# EAGLE board LED-Lamp (EAGLE 7.5.0)
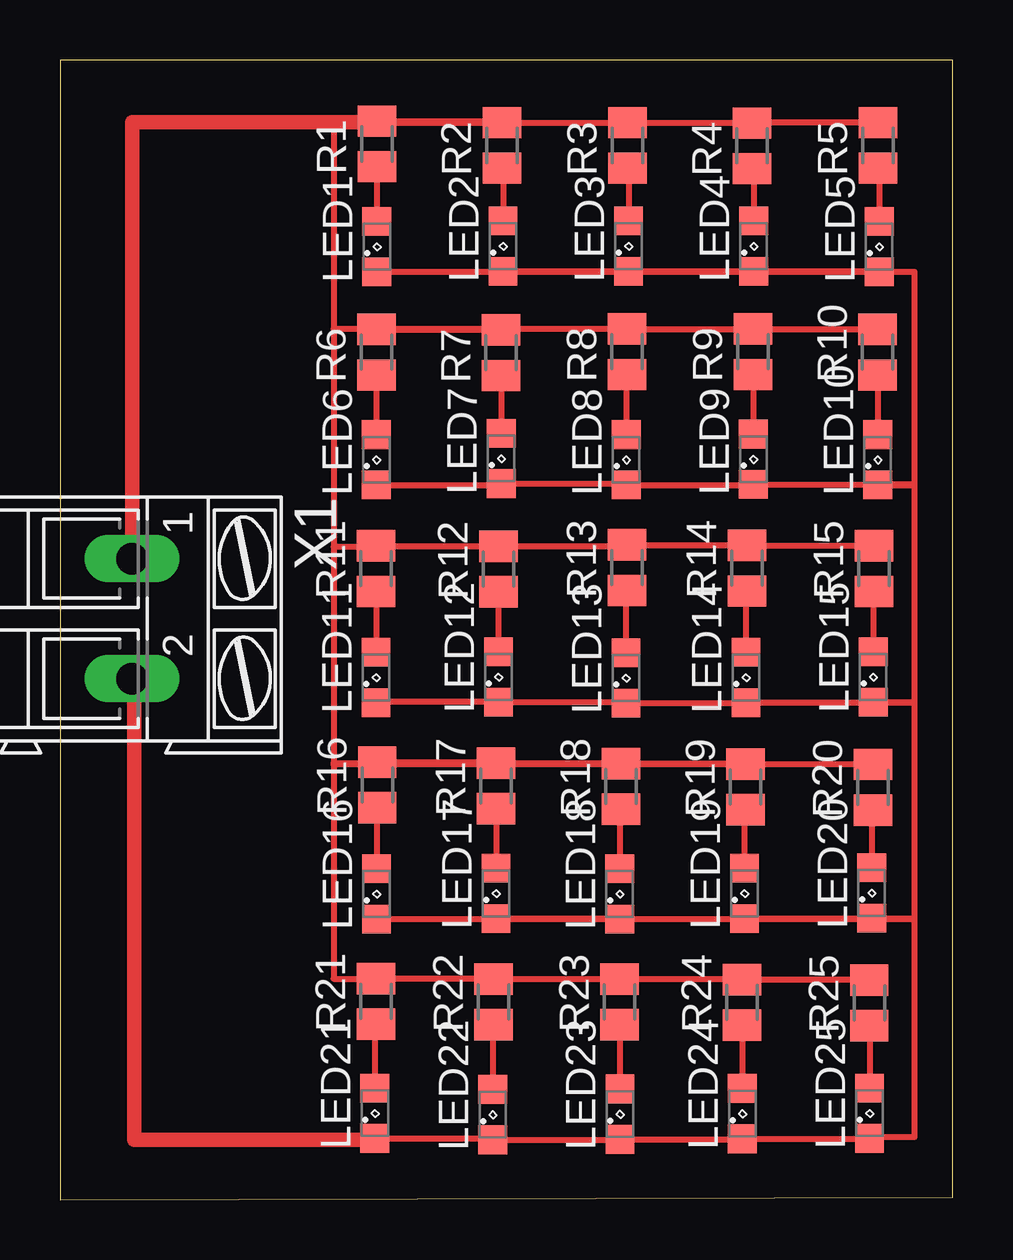
[diagram p0: board, top side]

Size 37.2 x 47.5 mm. Coordinates in mm from the lower left corner, seen from the top.
Outline: 0,0 37.2,0.1 37.2,47.5 0,47.5 0,0
Copper layers (1*16): Top 0.035mm / dielectric 1.5mm / Bottom 0.035mm
Design rules "default": minimum track width 10mil, minimum drill 24mil, track to track 8mil, track to pad 8mil, pad to pad 8mil, via to via 8mil, smd to smd 8mil, copper to edge 40mil, drill to drill 8mil, minimum pad ring 10mil, minimum via ring 8mil, stop-mask expansion 4mil, vias tented up to drill 0mil, thermal gap 10mil

## Footprints (pad centres in the part's own frame; a part is rotated, then mirrored left to right if it is on the bottom)
SML0805 = smd 1.2 x 1.2: A 1.05,0; C -1.05,0
M0805 = smd 1.3 x 1.6: 1 -0.95,0; 2 0.95,0
AK300/2 = drill 1.321 long: 1 -2.515,0; 2 2.489,0

## Placement (x,y rotation side)
LED1  [SML0805]  13.2,39.72 90 top
LED2  [SML0805]  18.46,39.74 90 top
LED3  [SML0805]  23.69,39.74 90 top
LED4  [SML0805]  28.9,39.74 90 top
LED5  [SML0805]  34.13,39.72 90 top
LED6  [SML0805]  13.18,30.84 90 top
LED7  [SML0805]  18.38,30.89 90 top
LED8  [SML0805]  23.59,30.84 90 top
LED9  [SML0805]  28.89,30.86 90 top
LED10  [SML0805]  34.07,30.84 90 top
LED11  [SML0805]  13.17,21.76 90 top
LED12  [SML0805]  18.27,21.78 90 top
LED13  [SML0805]  23.58,21.74 90 top
LED14  [SML0805]  28.58,21.76 90 top
LED15  [SML0805]  33.88,21.78 90 top
LED16  [SML0805]  13.19,12.74 90 top
LED17  [SML0805]  18.17,12.76 90 top
LED18  [SML0805]  23.32,12.74 90 top
LED19  [SML0805]  28.52,12.76 90 top
LED20  [SML0805]  33.82,12.78 90 top
LED21  [SML0805]  13.12,3.6 90 top
LED22  [SML0805]  18.03,3.54 90 top
LED23  [SML0805]  23.33,3.56 90 top
LED24  [SML0805]  28.43,3.58 90 top
LED25  [SML0805]  33.73,3.6 90 top
R1  100  [M0805]  13.2,44 90 top
R2  100  [M0805]  18.41,43.94 90 top
R3  100  [M0805]  23.64,43.94 90 top
R4  100  [M0805]  28.84,43.92 90 top
R5  100  [M0805]  34.08,43.94 90 top
R6  100  [M0805]  13.18,35.32 90 top
R7  100  [M0805]  18.38,35.3 90 top
R8  100  [M0805]  23.63,35.34 90 top
R9  100  [M0805]  28.87,35.34 90 top
R10  100  [M0805]  34.07,35.32 90 top
R11  100  [M0805]  13.17,26.3 90 top
R12  100  [M0805]  18.27,26.28 90 top
R13  100  [M0805]  23.62,26.34 90 top
R14  100  [M0805]  28.62,26.32 90 top
R15  100  [M0805]  33.92,26.3 90 top
R16  100  [M0805]  13.22,17.28 90 top
R17  100  [M0805]  18.17,17.24 90 top
R18  100  [M0805]  23.37,17.22 90 top
R19  100  [M0805]  28.57,17.2 90 top
R20  100  [M0805]  33.87,17.18 90 top
R21  100  [M0805]  13.17,8.26 90 top
R22  100  [M0805]  18.07,8.24 90 top
R23  100  [M0805]  23.32,8.24 90 top
R24  100  [M0805]  28.42,8.22 90 top
R25  100  [M0805]  33.72,8.2 90 top
X1  [AK300/2]  3,24.2 270 top

## Library data of the parts
LED1-LED25 = led
R1-R25 = rcl
X1 = con-ptr500; OC_FARNELL: unknown; OC_NEWARK: unknown

## Nets
GND: LED1.C LED2.C LED3.C LED4.C LED5.C LED6.C LED7.C LED8.C LED9.C LED10.C LED11.C LED12.C LED13.C LED14.C LED15.C LED16.C LED17.C LED18.C LED19.C LED20.C LED21.C LED22.C LED23.C LED24.C LED25.C X1.2
N$1: LED1.A R1.1
N$4: LED2.A R2.1
N$5: R1.2 R2.2 R3.2 R4.2 R5.2 R6.2 R7.2 R8.2 R9.2 R10.2 R11.2 R12.2 R13.2 R14.2 R15.2 R16.2 R17.2 R18.2 R19.2 R20.2 R21.2 R22.2 R23.2 R24.2 R25.2 X1.1
N$6: LED3.A R3.1
N$8: LED4.A R4.1
N$10: LED5.A R5.1
N$12: LED6.A R6.1
N$14: LED7.A R7.1
N$16: LED8.A R8.1
N$18: LED9.A R9.1
N$20: LED10.A R10.1
N$22: LED11.A R11.1
N$24: LED12.A R12.1
N$26: LED13.A R13.1
N$28: LED14.A R14.1
N$30: LED15.A R15.1
N$32: LED16.A R16.1
N$34: LED17.A R17.1
N$36: LED18.A R18.1
N$38: LED19.A R19.1
N$40: LED20.A R20.1
N$42: LED21.A R21.1
N$44: LED22.A R22.1
N$46: LED23.A R23.1
N$48: LED24.A R24.1
N$50: LED25.A R25.1

## Tracks (layer width: path | path; a pad name or v marks a point on that pad's centre or on a via)
GND
  Top 0.254: LED1.C 18.46,38.67 | 18.46,38.67 LED2.C LED3.C LED4.C 34.13,38.69 LED5.C | LED6.C 18.38,29.79 LED7.C 23.59,29.84 LED8.C 28.89,29.79 LED9.C 34.07,29.81 LED10.C | 18.46,38.67 35.6,38.67 35.6,29.8 LED10.C | LED11.C 13.17,20.73 LED12.C 23.58,20.73 LED13.C 28.58,20.69 LED14.C 33.88,20.71 LED15.C | LED10.C 35.6,29.79 35.6,20.7 33.88,20.7 LED15.C | LED15.C 35.6,20.73 35.6,11.7 33.82,11.7 LED20.C 33.82,11.71 LED19.C 28.52,11.69 LED18.C 23.32,11.71 LED17.C 18.17,11.69 LED16.C 35.6,11.69 35.6,2.6 33.73,2.6 LED25.C 33.73,2.53 LED24.C 28.43,2.51 LED23.C 23.33,2.49 LED22.C 18.03,2.55 LED21.C
  Top 0.61: X1.2 3.1,21.71 3.1,2.5 13.12,2.5 LED21.C
N$1
  Top 0.254: R1.1 LED1.A
N$4
  Top 0.254: R2.1 18.46,42.99 LED2.A
N$5
  Top 0.254: R1.2 18.41,44.95 R2.2 R3.2 28.84,44.89 | R5.2 28.84,44.89 | 28.84,44.89 R4.2 11.4,44.87 11.4,36.3 13.18,36.3 R6.2 18.38,36.27 R7.2 18.38,36.29 R8.2 | R8.2 R9.2 34.07,36.29 R10.2 | R8.2 11.4,36.29 11.4,27.2 | R15.2 33.92,27.27 R14.2 28.62,27.29 R13.2 23.62,27.23 R12.2 18.27,27.25 R11.2 13.17,27.2 11.4,27.2 | 11.4,27.2 11.4,18.2 13.22,18.2 R16.2 18.17,18.23 R17.2 23.37,18.19 R18.2 28.57,18.17 R19.2 33.87,18.15 R20.2 11.4,18.13 11.4,9.2 R21.2 18.07,9.21 R22.2 R23.2 28.42,9.19 R24.2 33.72,9.17 R25.2
  Top 0.61: X1.1 3,44.9 13.2,44.9 R1.2
N$6
  Top 0.254: R3.1 23.69,42.99 LED3.A
N$8
  Top 0.254: R4.1 28.9,42.97 LED4.A
N$10
  Top 0.254: R5.1 34.13,42.99 LED5.A
N$12
  Top 0.254: R6.1 LED6.A
N$14
  Top 0.254: R7.1 LED7.A
N$16
  Top 0.254: R8.1 23.59,34.39 LED8.A
N$18
  Top 0.254: R9.1 28.89,34.39 LED9.A
N$20
  Top 0.254: R10.1 LED10.A
N$22
  Top 0.254: R11.1 LED11.A
N$24
  Top 0.254: R12.1 LED12.A
N$26
  Top 0.254: R13.1 23.58,25.39 LED13.A
N$28
  Top 0.254: R14.1 28.58,25.37 LED14.A
N$30
  Top 0.254: R15.1 33.88,25.35 LED15.A
N$32
  Top 0.254: R16.1 13.19,16.33 LED16.A
N$34
  Top 0.254: R17.1 LED17.A
N$36
  Top 0.254: R18.1 23.32,16.27 LED18.A
N$38
  Top 0.254: R19.1 28.52,16.25 LED19.A
N$40
  Top 0.254: R20.1 33.82,16.23 LED20.A
N$42
  Top 0.254: R21.1 13.12,7.31 LED21.A
N$44
  Top 0.254: R22.1 18.03,7.29 LED22.A
N$46
  Top 0.254: R23.1 LED23.A
N$48
  Top 0.254: R24.1 LED24.A
N$50
  Top 0.254: R25.1 LED25.A